# EAGLE board FirstSketch_1 (EAGLE 9.5.2)
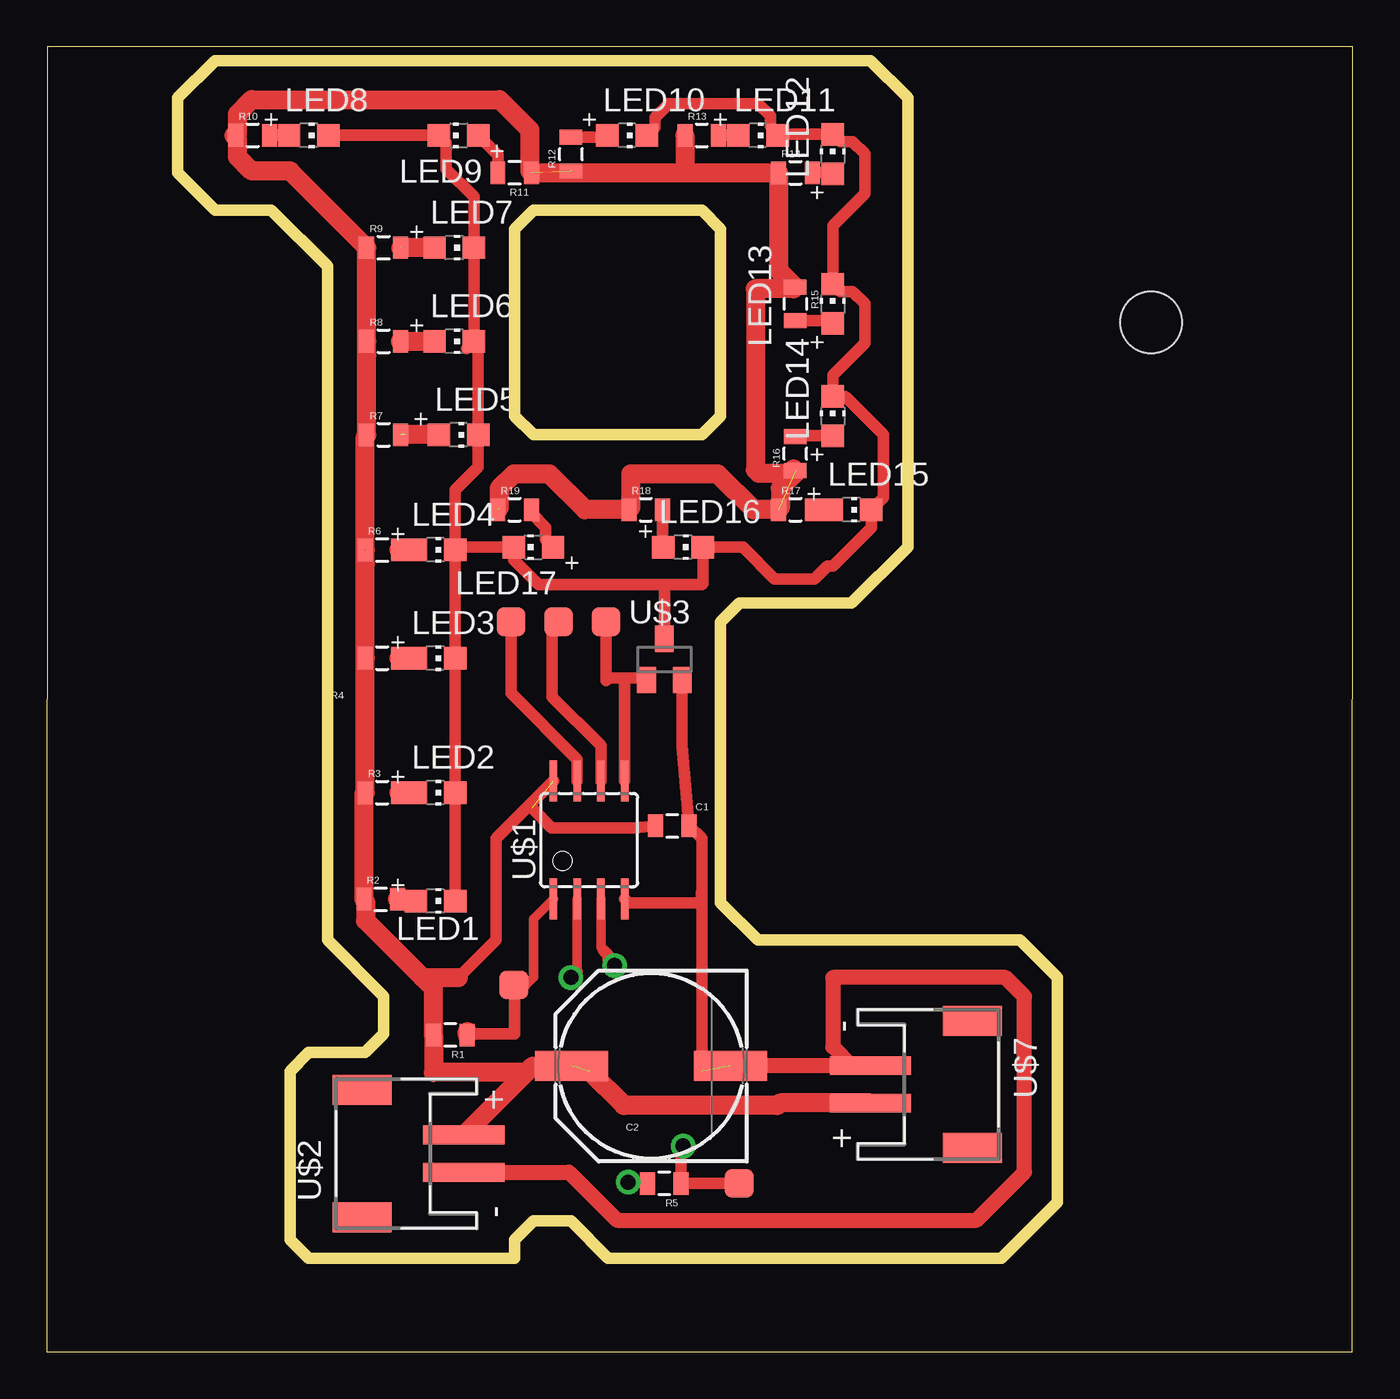
[diagram p0: board, top side]
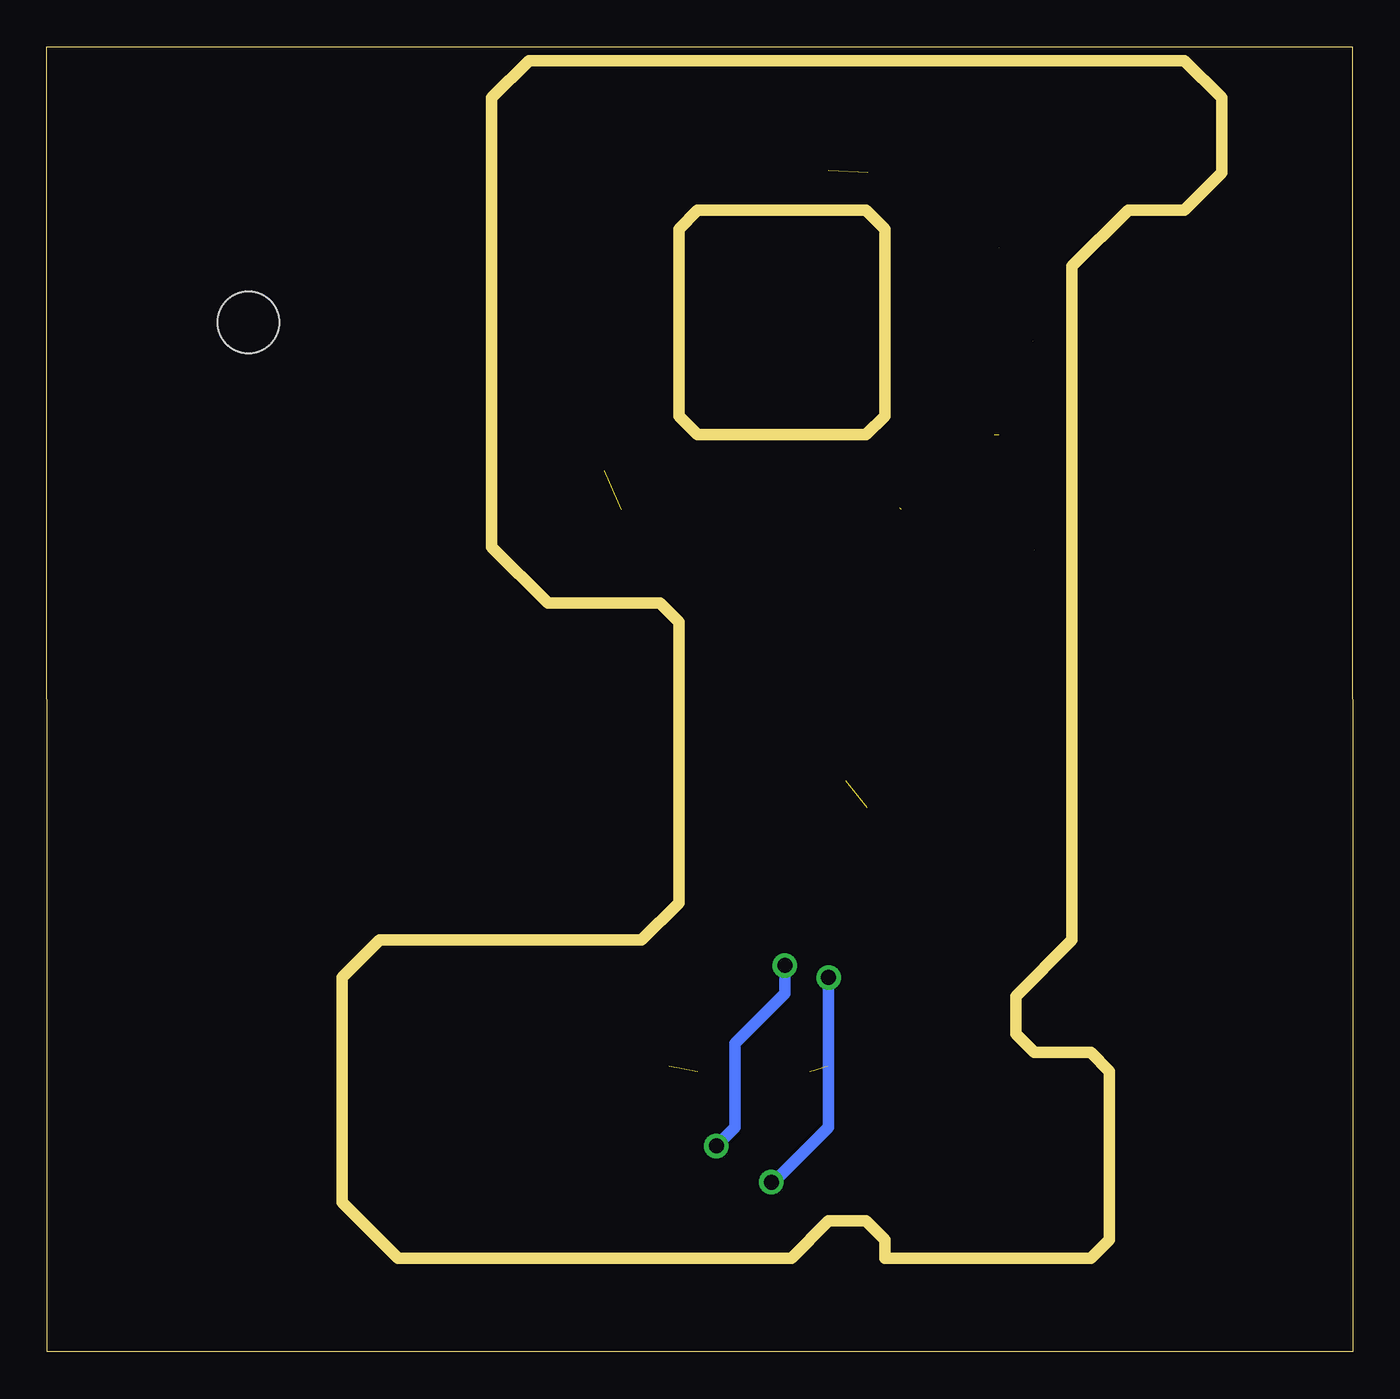
[diagram p1: board, bottom side, seen from below]

Size 69.78 x 69.73 mm. Coordinates in mm from the lower left corner, seen from the top.
Outline: 0,0 69.75,0 69.78,69.73 0.03,69.73 0,0
Outline: 9,69 7,67 7,63 9,61 12,61 15,58 15,22 18,19 18,17 17,16 14,16 13,15 13,6 14,5 25,5 25,6 26,7 28,7 30,5 51,5 54,8 54,20 52,22 38,22 36,24 36,39 37,40 43,40 46,43 46,67 44,69 9,69
Outline: 26,61 25,60 25,50 26,49 35,49 36,50 36,60 35,61 26,61
Copper layers (1*16): Top 0.035mm / dielectric 1.5mm / Bottom 0.035mm
Design rules "default": minimum track width 16mil, minimum drill 0.8mm, track to track 0.8mm, track to pad 0.8mm, pad to pad 0.8mm, via to via 0.8mm, smd to smd 0mil, copper to edge 1mil, drill to drill 1mil, minimum pad ring 10mil, minimum via ring 10mil, stop-mask expansion 1mil, vias tented up to drill 30mil, thermal gap 10mil
Holes 3.3 mm at 59,55

## Footprints (pad centres in the part's own frame; a part is rotated, then mirrored left to right if it is on the bottom)
0805 = smd 0.8 x 1.2: 1 -0.9,0; 2 0.9,0
CAP_RADIAL_CAN_10MM = smd 3.9 x 1.6: + 4.25,0; - -4.25,0
TESTPOINT-1 = smd 1.524 x 1.524: 1 0,0
CHIP-LED0805 = smd 1.2 x 1.2: A 0,-1.05; C 0,1.05
SOIC8 = smd 0.4 x 2.2: 1 -1.905,-3.154; 2 -0.635,-3.154; 3 0.635,-3.154; 4 1.905,-3.154; 5 1.905,3.154; 6 0.635,3.154; 7 -0.635,3.154; 8 -1.905,3.154
JST-PH-2-SMT-RA = smd 1 x 4.35: 1 1,-3.825; 2 -1,-3.825 | smd 1.6 x 3.15: NC1 -3.4,1.625; NC2 3.4,1.625
SOT23 = smd 1 x 1.4: 1 -0.95,-1.1; 2 0.95,-1.1; 3 0,1.1
TESTPOINT-3 = smd 1.524 x 1.524: 1 0,0; 2 2.54,0; 3 5.08,0

## Placement (x,y rotation side)
C1  0.1uF  [0805]  33.42,28.1 0 top
C2  [CAP_RADIAL_CAN_10MM]  32.29,15.27 180 top
CAPSENSOR  HEADER-1-TESTPOINT  [TESTPOINT-1]  37,9 90 top
LED1  [CHIP-LED0805]  20.77,24.09 270 top
LED2  [CHIP-LED0805]  20.77,29.88 270 top
LED3  [CHIP-LED0805]  20.77,37.07 270 top
LED4  [CHIP-LED0805]  20.77,42.85 270 top
LED5  [CHIP-LED0805]  22,49 270 top
LED6  [CHIP-LED0805]  21.77,54 270 top
LED7  [CHIP-LED0805]  21.77,59 270 top
LED8  [CHIP-LED0805]  14,65 270 top
LED9  [CHIP-LED0805]  22,65 90 top
LED10  [CHIP-LED0805]  31,65 270 top
LED11  [CHIP-LED0805]  38,65 270 top
LED12  [CHIP-LED0805]  42,64 0 top
LED13  [CHIP-LED0805]  42,56 0 top
LED14  [CHIP-LED0805]  42,50 0 top
LED15  [CHIP-LED0805]  43,45 270 top
LED16  [CHIP-LED0805]  34,43 270 top
LED17  [CHIP-LED0805]  26,43 90 top
R1  10K  [0805]  21.57,16.93 180 top
R2  470  [0805]  17.84,24.19 0 top
R3  470  [0805]  17.91,29.88 0 top
R4  470  [0805]  17.91,37.07 0 top
R5  1M  [0805]  33,9 180 top
R6  470  [0805]  17.91,42.85 0 top
R7  470  [0805]  18,49 0 top
R8  470  [0805]  18,54 0 top
R9  470  [0805]  18,59 0 top
R10  470  [0805]  11,65 0 top
R11  470  [0805]  25,63 180 top
R12  470  [0805]  28,64 90 top
R13  470  [0805]  35,65 0 top
R14  470  [0805]  40,63 0 top
R15  470  [0805]  40,56 270 top
R16  470  [0805]  40,48 90 top
R17  470  [0805]  40,45 0 top
R18  470  [0805]  32,45 0 top
R19  470  [0805]  25,45 0 top
U$1  MICRO_ATTINY85-20SU  [SOIC8]  28.98,27.35 0 top
U$2  CONN_BATTERY-LIPO-HORIZ  [JST-PH-2-SMT-RA]  18.47,10.6 90 top
U$3  COMPONENT_TRANSISTOR_NPN  [SOT23]  33,37 0 top
U$5  HEADER-1-TESTPOINT  [TESTPOINT-1]  24.95,19.6 0 top
U$6  HEADER-3-TESTPOINT  [TESTPOINT-3]  24.81,39.01 0 top
U$7  CONN_BATTERY-LIPO-HORIZ  [JST-PH-2-SMT-RA]  47.83,14.29 270 top

## Library data of the parts
C1 C2 CAPSENSOR LED1-LED17 R1-R19 U$1 U$2 U$5-U$7 = homemade-hardware
U$3 = homemade-hardware; PN: BSS806NH6327XTSA1

## Nets
A2/D4: CAPSENSOR.1 R5.1 U$1.3
A3/D3: R5.2 U$1.2
GND: C1.2 C2.- U$1.4 U$2.2 U$3.2 U$7.2
LED2TRANSISTOR: LED1.C LED2.C LED3.C LED4.C LED5.C LED6.C LED7.C LED8.C LED9.C LED10.C LED11.C LED12.C LED13.C LED14.C LED15.C LED16.C LED17.C U$3.3
MISO: U$1.6 U$6.2
MOSI: U$1.5 U$3.1 U$6.3
N$2: LED16.A R18.2
N$3: LED3.A R4.2
N$4: LED14.A R16.2
N$5: LED13.A R15.2
N$6: LED1.A R2.2
N$7: LED2.A R3.2
N$8: LED9.A R11.2
N$9: LED17.A R19.2
N$13: LED15.A R17.2
N$14: LED6.A R8.2
N$15: LED4.A R6.2
N$16: LED5.A R7.2
N$18: LED7.A R9.2
N$19: LED8.A R10.2
N$20: LED12.A R14.2
N$21: LED10.A R12.2
N$22: LED11.A R13.2
POWER: C1.1 C2.+ R1.2 R2.1 R3.1 R4.1 R6.1 R7.1 R8.1 R9.1 R10.1 R11.1 R12.1 R13.1 R14.1 R15.1 R16.1 R17.1 R18.1 R19.1 U$1.8 U$2.1 U$7.1
RESET: R1.1 U$1.1 U$5.1
SCK: U$1.7 U$6.1

## Tracks (layer width: path | path; a pad name or v marks a point on that pad's centre or on a via)
A2/D4  (via drill 0.8)
  Top 0.508: U$1.3 29.61,21.6 29.75,21.46
  Top 0.61: CAPSENSOR.1 R5.1 33.9,10.9 v34,11 | v30.34,20.64 30,20.98 30,21.21 29.75,21.46
  Bottom 0.61: v34,11 33,12 33,16.49 30.34,19.15 v30.34,20.64
A3/D3  (via drill 0.8)
  Top 0.508: U$1.2 28.34,20.34
  Top 0.61: v28,20 28.34,20.34 | v31.06,9.06 32.04,9.06 R5.2
  Bottom 0.61: v28,20 28,12 31,9 v31.06,9.06
GND  (1 unrouted)
  Top 0.61: 39.78,15.29 40,15.29 | U$3.2 33.95,32.37 C1.2 35,27.42 35,25.07 | 35,25.07 34.98,24.19 | 35,25.07 35,24 | U$1.4 31.07,24 35,24 | 35,24 35,15
  Top 0.813: U$7.2 43,15.29 | 43,15.29 40,15.29 36.56,15.29 C2.- | U$2.2 27.89,9.6 30.46,7.03 49.68,7.03 52.24,9.59 52.24,18.99 51.23,20 42,20 42,16.29 43,15.29
LED2TRANSISTOR
  Top 0.61: LED1.C LED2.C LED3.C LED4.C | 22.43,53.6 LED6.C | LED6.C LED7.C 22.82,61.72 21.34,63.19 21.34,64.61 LED9.C LED8.C | LED4.C 21.82,46.05 23.05,47.28 LED5.C 23.05,53.77 LED6.C | LED4.C 21.97,43 LED17.C 24.95,42.34 26.29,41 33,41 | 33,41 U$3.3 | 33,41 35,41 35.05,41.05 LED16.C 37.19,43 38.89,41.3 41.01,41.3 41.71,42 42,42 44.05,44.05 LED15.C 44.7,45.66 44.7,49.01 42.66,51.05 LED14.C 42,52.19 43.7,53.89 43.7,56.01 43.06,56.66 42.4,56.66 LED13.C 42,60.19 43.7,61.89 43.7,64.01 43.06,64.66 42.4,64.66 LED12.C 39.1,65.05 | LED11.C 39.1,65.05 | 39.1,65.05 38.66,65.5 38.66,66.06 38.01,66.7 33.24,66.7 32.49,65.95 32.49,65.44 LED10.C
MISO
  Top 0.61: U$1.6 29.61,32.39 27,35 27,38.66 U$6.2
MOSI
  Top 0.61: U$1.5 30.88,36 | 30.88,36 30,36 29.88,35.88 U$6.3 | 30.88,36 31.95,36 U$3.1
N$2
  Top 0.61: 32.8,44.91 R18.2 32.9,43.05 LED16.A
N$3
  Top 1.016: R4.2 LED3.A
N$4
  Top 0.61: R16.2 40.05,48.95 LED14.A
N$5
  Top 0.61: R15.2 41.85,55.1 LED13.A
N$6
  Top 1.016: R2.2 19.63,24.19 LED1.A
N$7
  Top 1.016: R3.2 LED2.A
N$8
  Top 0.61: LED9.A 24.1,63.95 R11.2
N$9
  Top 0.61: LED17.A 26.66,43.4 26.66,44.06 25.9,44.81 R19.2
N$13
  Top 0.61: LED15.A R17.2
N$14
  Top 1: R8.2
  Top 1.016: R8.2 LED6.A
N$15
  Top 1.016: R6.2 18.82,42.85 LED4.A
N$16  (1 unrouted)
  Top 1.016: LED5.A 19.14,49
N$18  (1 unrouted)
  Top 1.016: LED7.A 18.92,59
N$19
  Top 0.61: LED8.A R10.2
N$20
  Top 0.61: LED12.A 41.95,63 R14.2
N$21
  Top 0.61: LED10.A 29.85,64.9 R12.2
N$22
  Top 0.61: R13.2 LED11.A
POWER  (7 unrouted)
  Top 0.508: 25.62,14.93 25.7,15 26,15
  Top 0.61: C1.1 31.38,28 26.98,28 25.93,29.05 | U$1.8 24,27.43 24,22 22,20
  Top 1.016: U$2.1 25.62,14.93 | 20.08,20 17.03,23.04 17.03,24.09 R2.1 16.94,29.82 R3.1 R4.1 17.01,42.09 17,42.1 R6.1 | 20.08,20 20.66,19.41 R1.2 20.66,14.93 25.62,14.93 | 20.08,20 22,20 | R6.1 17.01,48.91 R7.1 17.1,53.24 17.09,53.25 R8.1 | R8.1 R9.1 13.01,63.09 10.96,63.09 10.19,63.86 10.19,64.81 10,65 R10.1 10.19,65.09 10.19,66.14 10.96,66.91 24.19,66.91 25.81,65.29 25.81,63.09 R11.1 34.19,63 | R13.1 34.1,63.09 34.19,63 | 34.19,63 R14.1 39.1,57.8 R15.1 39.91,56.81 37.86,56.81 37.86,47.14 38.05,46.95 40,46.95 39.19,46.14 39.19,45.09 R17.1 37.75,45 35.84,46.91 31.19,46.91 31.19,45.09 R18.1 28.75,45 26.84,46.91 24.96,46.91 24.19,46.14 24.19,45.09 | 39.91,47.19 R16.1 | U$7.1 39.16,13.29 39.03,13.16 30.84,13.16 29,15 | 25.62,14.93 25.97,15.27 C2.+
RESET
  Top 0.508: U$1.1 26,23.12 26,20 25.6,19.6 25,19.6 U$5.1 24.95,19.05 25,19
  Top 0.61: R1.1 22.54,17 25,17 25,19.6
  Top 1.016: R1.1 22.46,17.12 | U$5.1 24.83,19.72
SCK
  Top 0.61: U$1.7 28.34,31.66 24.81,35.19 U$6.1